# Altium PCB PCB2_1.pcbdoc
Units mil, origin at the board's own origin, x right, y up, seen from the top; angles counter-clockwise.
Board outline 5820.75 x 2630.3 mil, 2 copper layers (Top Layer, Bottom Layer); 13 components, 47 nets, 108 pads, 13 vias.
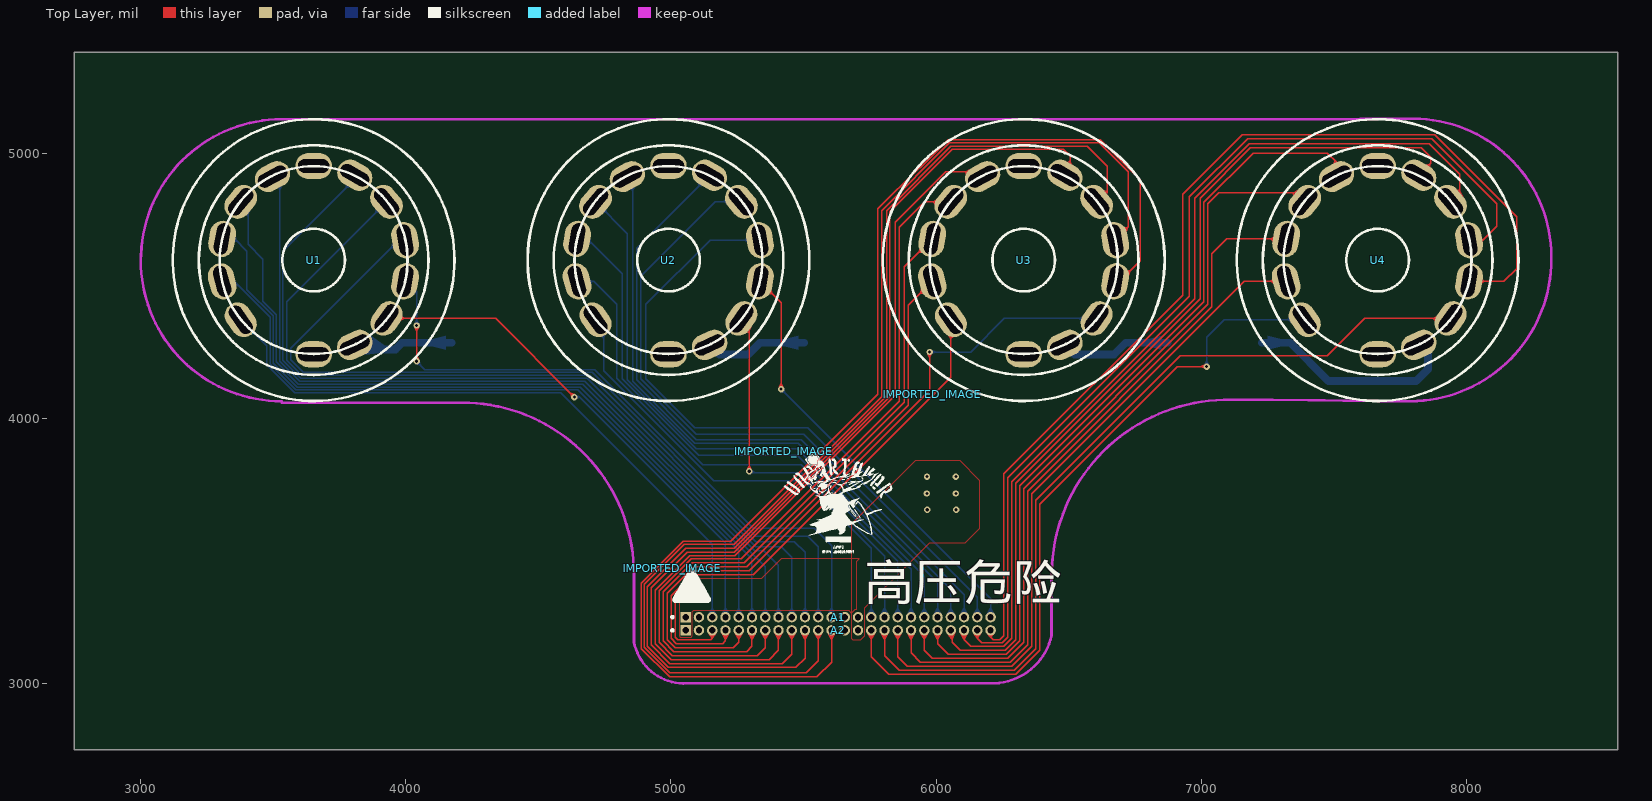
[diagram p0: Top Layer view]
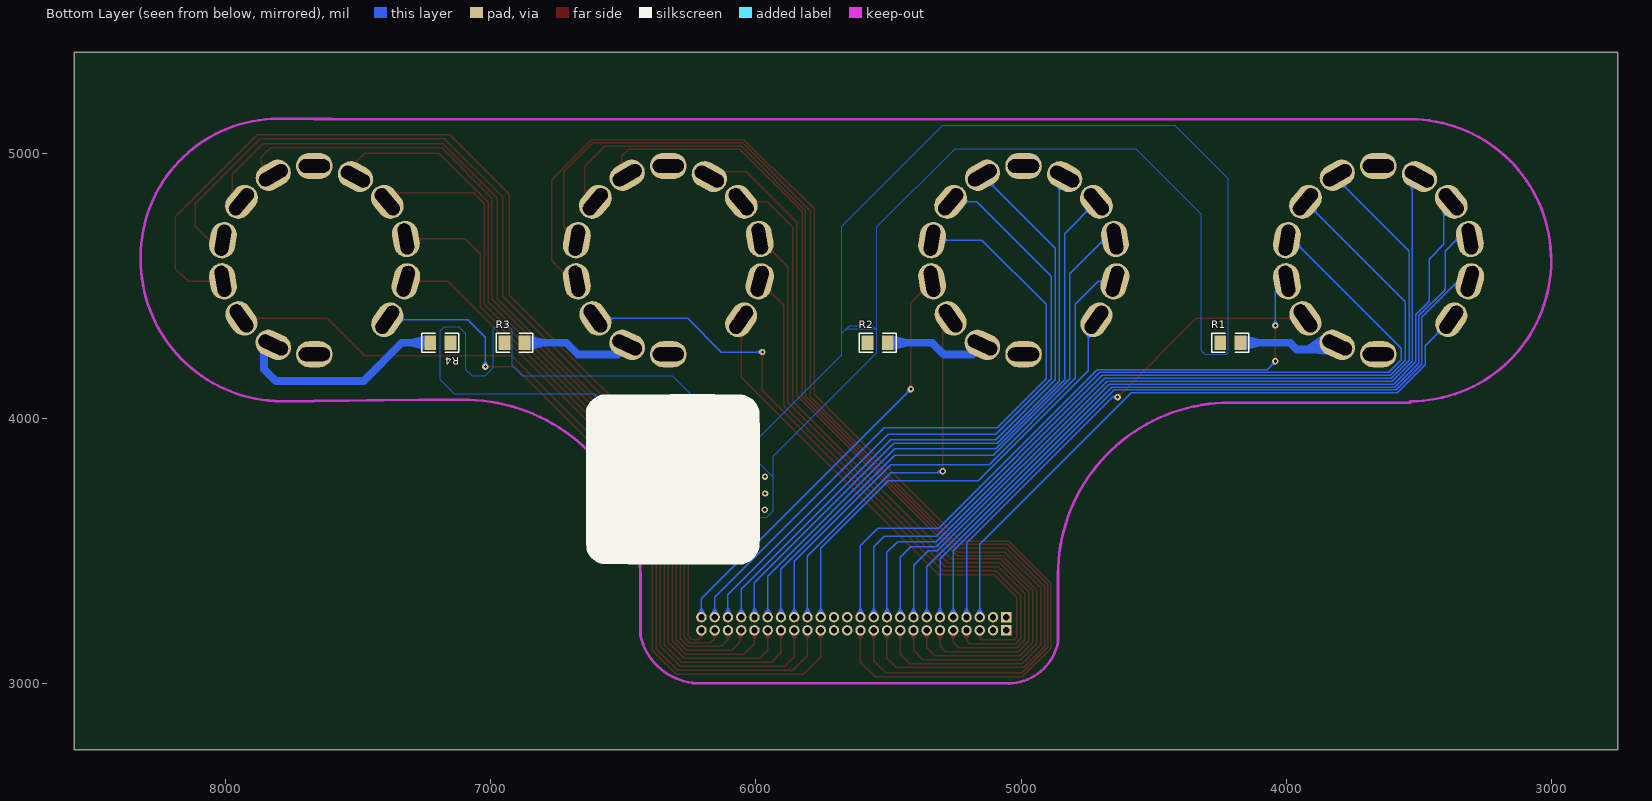
[diagram p1: Bottom Layer view, seen from below]

## Layer stack, top to bottom
Top Layer: signal copper (thickness not stored)
Dielectric: dielectric 12.6, FR-4, Dk 4.8
Bottom Layer: signal copper (thickness not stored)

## Board outline
8570.75,2750 2750,2750 2750,5380.3 8570.75,5380.3

## Components (designator, comment, footprint, x,y, rotation, side; value= is the part's Value field where it differs from the comment)
A1 "1.27*24Pin" 1.27*24PIN_MYSELF 5055.75,3250.3 r90 top
A2 "1.27*24Pin" 1.27*24PIN_MYSELF 5055.75,3200.3 r90 top
IMPORTED_IMAGE "IMPORTED_IMAGE" IMPORTED_IMAGE 5985.75,4090.3 r0 top
IMPORTED_IMAGE "IMPORTED_IMAGE" IMPORTED_IMAGE 5005.75,3435.3 r0 top
IMPORTED_IMAGE "IMPORTED_IMAGE" IMPORTED_IMAGE 5425.75,3875.3 r0 top
R1 "RTX051002BETP" R0805 4210.75,4285.31 r180 bottom
R2 "RTX051002BETP" R0805 5540.75,4285.31 r180 bottom
R3 "RTX051002BETP" R0805 6910.75,4285.31 r180 bottom
R4 "RTX051002BETP" R0805 7190.75,4285.3 r0 bottom
U1 "QS30-1" QS30-1管座 3652.25,4596.95 r0 top
U2 "QS30-1" QS30-1管座 4990.75,4596.95 r0 top
U3 "QS30-1" QS30-1管座 6330.75,4596.95 r0 top
U4 "QS30-1" QS30-1管座 7665.75,4596.95 r0 top

## Footprints (in the part's own frame and the unit in brackets; to place one, negate y for a bottom-side part, rotate by r counter-clockwise, add the part's x,y. Pads: shape width x height; smd on the part's side, far side on the other; paste and mask are expansions set on the pad)
1.27*24PIN_MYSELF [mm]
  rect 1x1 hole 0.6: 1(0,0)
  round 1 hole 0.6: 2(0,-1.27) 3(0,-2.54) 4(0,-3.81) 5(0,-5.08) 6(0,-6.35) 7(0,-7.62) 8(0,-8.89) 9(0,-10.16) 10(0,-11.43) 11(0,-12.7) 12(0,-13.97) 13(0,-15.24) 14(0,-16.51) 15(0,-17.78) 16(0,-19.05) 17(0,-20.32) 18(0,-21.59) 19(0,-22.86) 20(0,-24.13) 21(0,-25.4) 22(0,-26.67) 23(0,-27.94) 24(0,-29.21)
  silkscreen extent -0.09,1.18 0.09,1.36
IMPORTED_IMAGE [mil]
QS30-1管座 [mm]
  oval 3.5x2.5 hole 1.3 slot 3 at 0 deg: 1(0,-9.017) 8(0,9.017)
  oval 3.5x2.5 hole 1.3 slot 3 at 25 deg rot 25: 2(3.937,-8.128)
  oval 3.5x2.5 hole 1.3 slot 3 at 55 deg rot 55: 3(6.985,-5.588)
  oval 3.5x2.5 hole 1.3 slot 3 at 80 deg rot 80: 4(8.763,-2.032) 11(-8.763,2.032)
  oval 3.5x2.5 hole 1.3 slot 3 at 100 deg rot 100: 5(8.763,1.905)
  oval 3.5x2.5 hole 1.3 slot 3 at 130 deg rot 130: 6(6.985,5.588)
  oval 3.5x2.5 hole 1.3 slot 3 at 150 deg rot 150: 7(3.937,8.128)
  oval 3.5x2.5 hole 1.3 slot 3 at 28 deg rot 28: 9(-3.937,8.001)
  oval 3.5x2.5 hole 1.3 slot 3 at 50 deg rot 50: 10(-6.985,5.588)
  oval 3.5x2.5 hole 1.3 slot 3 at 105 deg rot 105: 12(-8.763,-2.032)
  oval 3.5x2.5 hole 1.3 slot 3 at 125 deg rot 125: 13(-6.985,-5.715)
  silkscreen extent -13.5,-13.5 13.5,13.5
R0805 [mil]
  rect 44.6x54.2 smd: 1(-38,0) 2(38,0)
  silkscreen extent -69,-36 69,36

## Via types
v1: diameter 24.02, hole 12.01, Top Layer to Bottom Layer, 13 vias

## Nets (pads, with @x,y where several pads share a name; then routed paths per layer and width w, separated by ;. In a path a pad name is that pad's centre, name@x,y a point inside that pad or via, vN(x,y) a via of type N, cw(c..) or ccw(c..) an arc to the next point about the centre after c; other vN are vias at no path point)
1_0: A1.3 U1.13 | length 2446.4
  Bottom Layer w5: U1.13 3475.75,4273.45 3475.75,4201.41 3580.92,4096.24 4584.81,4096.24 5155.75,3525.3 A1.3@5155.75,3250.3
1_1: A1.4 U1.3 | length 1909.2
  Top Layer w5: U1.3@3927.25,4376.95 4339.1,4376.95 v1(4635.75,4080.3)
  Bottom Layer w5: v1(4635.75,4080.3) 4655.75,4080.3 5205.75,3530.3 A1.4@5205.75,3250.3
1_2: A1.5 U1.12 | length 2723.8
  Bottom Layer w5: U1.12 3353.54,4516.95 3488.75,4381.75 3488.75,4203.96 3585.47,4107.24 4648.81,4107.24 5255.75,3500.3 A1.5@5255.75,3250.3
1_3: A1.6 U1.11 | length 2907.4
  Bottom Layer w5: U1.11@3307.25,4676.95 3354.1,4676.95 3400.75,4630.3 3400.75,4485.3 3499.75,4386.3 3499.75,4208.52 3590.03,4118.24 4657.81,4118.24 5305.75,3470.3 A1.6@5305.75,3250.3
1_4: A1.7 U1.10 | length 3014.3
  Bottom Layer w5: U1.10 3405.1,4789.1 3405.1,4655.95 3460.75,4600.3 3460.75,4440.86 3510.75,4390.86 3510.75,4213.08 3594.59,4129.24 4666.81,4129.24 5355.75,3440.3 A1.7@5355.75,3250.3
1_5: A1.8 U1.9 | length 3103.4
  Bottom Layer w5: U1.9 3524.75,4884.45 3524.75,4214.63 3599.14,4140.24 4675.81,4140.24 5315.75,3500.3 5350.75,3500.3 5405.75,3445.3 A1.8@5405.75,3250.3
1_6: A1.9 U1.7 | length 3263.3
  Bottom Layer w5: U1.7 3807.25,4901.8 3535.75,4630.3 3535.75,4219.19 3603.7,4151.24 4684.81,4151.24 5320.75,3515.3 5415.75,3515.3 5455.75,3475.3 A1.9@5455.75,3250.3
1_7: A1.10 U1.6 | length 3253.2
  Bottom Layer w5: U1.6 3550.75,4440.45 3550.75,4219.75 3608.26,4162.24 4693.81,4162.24 5320.75,3535.3 5465.75,3535.3 5505.75,3495.3 A1.10@5505.75,3250.3
1_8: A1.11 U1.5 | length 3192
  Bottom Layer w5: U1.5 3972.4,4671.95 3565.75,4265.3 3565.75,4220.3 3612.81,4173.24 4702.81,4173.24 5320.75,3555.3 5515.75,3555.3 5555.75,3515.3 A1.11@5555.75,3250.3
1_9: A1.12 U1.4 | length 2442.5
  Top Layer w5: v1(4040.75,4215.3) v1(4040.75,4350.3)
  Bottom Layer w5: U1.4@3997.25,4516.95 4040.75,4473.45 v1(4040.75,4350.3) ; v1(4040.75,4215.3) 4071.81,4184.24 4711.81,4184.24 5310.75,3585.3 5540.75,3585.3 5605.75,3520.3 A1.12@5605.75,3250.3
2_0: A1.15 U2.13 | length 1751.6
  Bottom Layer w5: U2.13 4745.75,4341.95 4745.75,4180.3 5160.75,3765.3 5500.75,3765.3 5755.75,3510.3 A1.15@5755.75,3250.3
2_1: A1.16 U2.3 | length 1461.6
  Top Layer w5: U2.3 5295.75,4346.95 v1(5295.75,3800.3)
  Bottom Layer w5: v1(5295.75,3800.3) 5300.75,3795.3 5490.75,3795.3 5805.75,3480.3 A1.16@5805.75,3250.3
2_2: A1.17 U2.12 | length 2021.7
  Bottom Layer w5: U2.12 4709.1,4516.95 4794.75,4431.3 4794.75,4151.3 5120.75,3825.3 5490.75,3825.3 5855.75,3460.3 A1.17@5855.75,3250.3
2_3: A1.18 U2.11 | length 2188.4
  Bottom Layer w5: U2.11 4684.1,4676.95 4815.75,4545.3 4815.75,4149.19 5104.64,3860.3 5475.75,3860.3 5905.75,3430.3 A1.18@5905.75,3250.3
2_4: A1.19 U2.10 | length 2303.2
  Bottom Layer w5: U2.10@4715.75,4816.95 4835.75,4696.95 4835.75,4144.75 5095.19,3885.3 5475.75,3885.3 5955.75,3405.3 A1.19@5955.75,3250.3
2_5: A1.20 U2.9 | length 2374.7
  Bottom Layer w5: U2.9@4835.75,4911.95 4855.75,4891.95 4855.75,4140.3 5090.75,3905.3 5480.75,3905.3 6005.75,3380.3 A1.20@6005.75,3250.3
2_6: A1.21 U2.7 | length 2502.8
  Bottom Layer w5: U2.7@5145.75,4916.95 4870.75,4641.95 4870.75,4145.3 5095.75,3920.3 5490.75,3920.3 6055.75,3355.3 A1.21@6055.75,3250.3
2_7: A1.22 U2.6 | length 2524.2
  Bottom Layer w5: U2.6 5167.4,4816.95 4885.75,4535.3 4885.75,4150.3 5095.75,3940.3 5500.75,3940.3 6105.75,3335.3 A1.22@6105.75,3250.3
2_8: A1.23 U2.5 | length 2476.8
  Bottom Layer w5: U2.5@5335.75,4671.95 5147.4,4671.95 4905.75,4430.3 4905.75,4150.3 5090.75,3965.3 5515.75,3965.3 6155.75,3325.3 A1.23@6155.75,3250.3
2_9: A1.24 U2.4 | length 1627
  Top Layer w5: U2.4 5415.75,4436.95 v1(5415.75,4110.3)
  Bottom Layer w5: v1(5415.75,4110.3) 6205.75,3320.3 A1.24@6205.75,3250.3
3_0: A2.3 U3.13 | length 1926.7
  Top Layer w5: A2.3@5155.75,3200.3 5155.75,3170.3 5150.75,3165.3 5025.75,3165.3 5015.75,3175.3 5015.75,3325.3 5100.75,3410.3 5310.75,3410.3 6055.75,4155.3 U3.13
3_1: A2.4 U3.3 | length 2540.9
  Top Layer w5: A2.4@5205.75,3200.3 5205.75,3160.3 5195.75,3150.3 5020.75,3150.3 5000.75,3170.3 5000.75,3330.3 5095.75,3425.3 5295.75,3425.3 5975.75,4105.3 v1(5975.75,4250.3)
  Bottom Layer w5: v1(5975.75,4250.3) 6130.75,4250.3 6257.4,4376.95 U3.3
3_2: A2.5 U3.12 | length 2218.7
  Top Layer w5: A2.5@5255.75,3200.3 5255.75,3155.3 5235.75,3135.3 5015.75,3135.3 4985.75,3165.3 4985.75,3340.3 5085.75,3440.3 5285.75,3440.3 5895.75,4050.3 5895.75,4426.95 U3.12
3_3: A2.6 U3.11 | length 2471.2
  Top Layer w5: A2.6@5305.75,3200.3 5305.75,3140.3 5285.75,3120.3 5010.75,3120.3 4970.75,3160.3 4970.75,3345.3 5080.75,3455.3 5275.75,3455.3 5880.75,4060.3 5880.75,4571.95 U3.11
3_4: A2.7 U3.10 | length 2784.3
  Top Layer w5: A2.7@5355.75,3200.3 5355.75,3135.3 5325.75,3105.3 5005.75,3105.3 4955.75,3155.3 4955.75,3350.3 5075.75,3470.3 5265.75,3470.3 5860.75,4065.3 5860.75,4720.3 5957.4,4816.95 U3.10@6055.75,4816.95
3_5: A2.8 U3.9 | length 3059.8
  Top Layer w5: A2.8@5405.75,3200.3 5405.75,3125.3 5370.75,3090.3 5000.75,3090.3 4940.75,3150.3 4940.75,3350.86 5071.19,3481.3 5240.75,3481.3 5845.75,4086.3 5845.75,4740.3 6035.75,4930.3 6157.4,4930.3 U3.9@6175.75,4911.95
3_6: A2.9 U3.7 | length 3645.1
  Top Layer w5: A2.9@5455.75,3200.3 5455.75,3110.3 5420.75,3075.3 4995.75,3075.3 4925.75,3145.3 4925.75,3360.3 5060.75,3495.3 5239.19,3495.3 5824.97,4081.08 5824.97,4779.52 6060.75,5015.3 6480.75,5015.3 6505.75,4990.3 6505.75,4936.95 U3.7@6485.75,4916.95
3_7: A2.10 U3.6 | length 3986.2
  Top Layer w5: A2.10@5505.75,3200.3 5505.75,3095.3 5470.75,3060.3 4990.75,3060.3 4910.75,3140.3 4910.75,3365.3 5055.75,3510.3 5238.64,3510.3 5813.97,4085.64 5813.97,4784.08 6056.19,5026.3 6569.75,5026.3 6645.75,4950.3 6645.75,4856.95 U3.6
3_8: A2.11 U3.5 | length 4319.8
  Top Layer w5: A2.11@5555.75,3200.3 5555.75,3085.3 5510.75,3040.3 4995.19,3040.3 4899.75,3135.75 4899.75,3374.3 5050.75,3525.3 5238.08,3525.3 5794.42,4081.64 5794.42,4783.97 6050.75,5040.3 6615.75,5040.3 6725.75,4930.3 6725.75,4721.95 U3.5@6675.75,4671.95
3_9: A2.12 U3.4 | length 4630.9
  Top Layer w5: A2.12@5605.75,3200.3 5605.75,3080.3 5550.75,3025.3 4994.64,3025.3 4888.75,3131.19 4888.75,3378.86 5046.19,3536.3 5225.75,3536.3 5780.75,4091.3 5780.75,4790.3 5935.75,4945.3 5940.19,4945.3 6046.19,5051.3 6620.31,5051.3 6770.75,4900.86 6770.75,4595.3 6692.4,4516.95 U3.4
4_0: A2.15 U4.13 | length 2702.2
  Top Layer w5: A2.15@5755.75,3200.3 5755.75,3100.3 5820.75,3035.3 6300.75,3035.3 6390.75,3125.3 6390.75,3675.3 6910.75,4195.3 v1(7020.75,4195.3)
  Bottom Layer w5: v1(7020.75,4195.3) 7020.75,4305.3 7087.4,4371.95 U4.13
4_1: A2.16 U4.3 | length 3130.3
  Top Layer w5: A2.16@5805.75,3200.3 5805.75,3105.3 5860.75,3050.3 6295.75,3050.3 6375.75,3130.3 6375.75,3690.3 6920.75,4235.3 7475.75,4235.3 7617.4,4376.95 U4.3
4_2: A2.17 U4.12 | length 2517.6
  Top Layer w5: A2.17@5855.75,3200.3 5855.75,3100.3 5890.75,3065.3 6285.75,3065.3 6360.75,3140.3 6360.75,3715.3 7162.4,4516.95 U4.12
4_3: A2.18 U4.11 | length 2632.8
  Top Layer w5: A2.18@5905.75,3200.3 5905.75,3115.3 5940.75,3080.3 6280.75,3080.3 6345.75,3145.3 6345.75,3725.3 7040.75,4420.3 7040.75,4620.3 7097.4,4676.95 U4.11
4_4: A2.19 U4.10 | length 2825.5
  Top Layer w5: A2.19@5955.75,3200.3 5955.75,3125.3 5985.75,3095.3 6270.75,3095.3 6330.75,3155.3 6330.75,3735.3 7025.75,4430.3 7025.75,4810.3 7065.75,4850.3 7357.4,4850.3 U4.10@7390.75,4816.95
4_5: A2.20 U4.9 | length 2984.6
  Top Layer w5: A2.20@6005.75,3200.3 6005.75,3150.3 6045.75,3110.3 6265.75,3110.3 6315.75,3160.3 6315.75,3745.3 7010.75,4440.3 7010.75,4815.3 7195.75,5000.3 7475.75,5000.3 7510.75,4965.3 U4.9@7510.75,4911.95
4_6: A2.21 U4.7 | length 3319.1
  Top Layer w5: A2.21@6055.75,3200.3 6060.75,3195.3 6060.75,3155.3 6090.75,3125.3 6260.75,3125.3 6300.75,3165.3 6300.75,3755.3 6995.75,4450.3 6995.75,4830.3 7185.75,5020.3 7830.75,5020.3 7865.75,4985.3 7865.75,4961.95 U4.7@7820.75,4916.95
4_7: A2.22 U4.6 | length 3437.9
  Top Layer w5: A2.22@6105.75,3200.3 6105.75,3165.3 6130.75,3140.3 6255.75,3140.3 6285.75,3170.3 6285.75,3760.3 6975.75,4450.3 6975.75,4830.3 7180.75,5035.3 7860.75,5035.3 7975.75,4920.3 7975.75,4845.3 7947.4,4816.95 U4.6
4_8: A2.23 U4.5 | length 3668.8
  Top Layer w5: A2.23@6155.75,3200.3 6155.75,3170.3 6171.75,3154.3 6249.75,3154.3 6270.75,3175.3 6270.75,3775.3 6955.75,4460.3 6955.75,4835.3 7175.75,5055.3 7870.75,5055.3 8115.75,4810.3 8115.75,4725.3 8062.4,4671.95 U4.5@8010.75,4671.95
4_9: A2.24 U4.4 | length 3906.6
  Top Layer w5: A2.24@6205.75,3200.3 6205.75,3175.3 6215.75,3165.3 6240.75,3165.3 6255.75,3180.3 6255.75,3790.3 6930.75,4465.3 6930.75,4845.3 7155.75,5070.3 7880.75,5070.3 8190.75,4760.3 8190.75,4565.3 8142.4,4516.95 U4.4
$1N539: R1.2 U1.2 | length 382.7
  Bottom Layer w30: U1.2 3823.9,4260.3 3960.75,4260.3 3985.75,4285.3 R1.2@4172.71,4285.3
$1N910: R2.2 U2.2 | length 390.8
  Bottom Layer w30: U2.2 5182.4,4240.3 5290.75,4240.3 5335.75,4285.3 R2.2@5502.71,4285.3
$1N1217: R3.2 U3.2 | length 420.8
  Bottom Layer w30: U3.2 6522.4,4240.3 6670.75,4240.3 6715.75,4285.3 R3.2@6872.71,4285.3
$1N1524: R4.2 U4.2 | length 811.8
  Bottom Layer w30: R4.2 7335.75,4285.31 7480.75,4140.3 7810.75,4140.3 7855.75,4185.3 7855.75,4241.95 U4.2
GND: A1.2 A1.13 A2.2 A2.13
HV: A1.1 A1.14 A2.1 A2.14 R1.1 R2.1 R3.1 R4.1
  other v1: 5966.59,3655.3 6075.75,3655.3 5965.49,3716.45 6075.04,3716.45 5965.75,3780.3 6075.04,3780.3
"": U1.1 U1.8 U2.1 U2.8 U3.1 U3.8 U4.1 U4.8

## Polygon pours and split planes (outlines as drawn)
HV on Top Layer (solid, remove dead copper, pour order 0): 5685.75,3165.3 5715.75,3165.3 5730.75,3180.3 5730.75,3285.3 5975.75,3530.3 6110.75,3530.3 6165.75,3585.3 6165.75,3765.3 6090.75,3840.3 5920.75,3840.3 5680.75,3600.3 5680.75,3170.3
HV on Top Layer (solid, remove dead copper, pour order 1): 5030.75,3180.3 5035.75,3175.3 5075.75,3175.3 5080.75,3180.3 5080.75,3270.3 5085.75,3275.3 5670.75,3275.3 5680.75,3265.3 5695.75,3280.3 5700.75,3280.3 5700.75,3460.3 5710.75,3470.3 5415.75,3470.3 5340.75,3395.3 5110.75,3395.3 5030.75,3315.3
HV on Bottom Layer (solid, remove dead copper, pour order 2): 5935.75,3780.3 5935.75,3650.3 5960.75,3625.3 6100.75,3625.3 6120.75,3645.3 6120.75,3795.3 5675.75,4240.3 5675.75,4320.3 5645.75,4350.3 5560.75,4350.3 5545.75,4335.3 5545.75,4245.3 5935.75,3855.3
HV on Bottom Layer (solid, remove dead copper, pour order 3): 4220.75,4320.3 4220.75,4245.3 4225.75,4240.3 4305.75,4240.3 4320.75,4255.3 4320.75,4770.3 4565.75,5015.3 5250.75,5015.3 5545.75,4720.3 5545.75,4335.3 5660.75,4335.3 5675.75,4320.3 5675.75,4725.3 5295.75,5105.3 4420.75,5105.3 4220.75,4905.3
HV on Bottom Layer (solid, remove dead copper, pour order 5): 7135.75,4090.3 7190.75,4145.3 7190.75,4330.3 7175.75,4345.3 7120.75,4345.3 7095.75,4320.3 7095.75,4185.3 7070.75,4160.3 7020.75,4160.3 6990.75,4190.3 6990.75,4335.3 6980.75,4345.3 6930.75,4345.3 6920.75,4335.3 6920.75,4200.3 6880.75,4160.3 6315.75,4160.3 5935.75,3780.3 5935.75,3650.3 5960.75,3625.3 6100.75,3625.3 6120.75,3645.3 6120.75,3795.3 6315.75,3795.3 6610.75,4090.3
HV on Bottom Layer (solid, remove dead copper, pour order 6): 7135.75,4090.3 7190.75,4145.3 7190.75,4330.3 7175.75,4345.3 7120.75,4345.3 7095.75,4320.3 7095.75,4185.3 7070.75,4160.3 7020.75,4160.3 6990.75,4190.3 6990.75,4335.3 6980.75,4345.3 6930.75,4345.3 6920.75,4335.3 6920.75,4200.3 6880.75,4160.3 6315.75,4160.3 5935.75,3780.3 5935.75,3650.3 5960.75,3625.3 6100.75,3625.3 6120.75,3645.3 6120.75,3780.3 6345.75,4005.3 6610.75,4090.3

## Keep-outs
Board Outline Layer:
  lines w10 net "": 3000,4596.05 ccw(c3531.5,4596.05) 3531.5,4064.55 ; 3000.75,4596.95 cw(c3532.25,4596.95) 3532.25,5128.45 3652.25,5128.45 7665.75,5128.45 ; 3531.5,4059.55 4211.5,4059.55 cw(c4211.5,3410.3) 4860.75,3410.3 4860.75,3155.3 ccw(c5049.95,3192.9) 5060.75,3000.3 6205.75,3000.3 ccw(c6210.35,3231.37) 6435.75,3180.3 6435.75,3415.3 ; 6436.12,3420.68 cw(c7100.68,3405.37) 7085.37,4069.93 ; 7085.38,4069.93 7270.38,4069.93 7270.75,4070.3 7665.6,4065.3 ccw(c7665.6,4065.45) 7665.75,4065.45 ; 7600.75,5130.3 7800.75,5130.3 cw(c7800.75,4610.3) 8320.75,4610.3 8320.75,4600.3 cw(c7786.25,4599.04) 7790,4064.55 7670,4064.55

## Other copper
Top Layer:
  region net 1_1: 3991.59,4374.45 3993.33,4379.45 3987.2,4385.7 3981,4368.2
  region net 3_9: 6732.28,4553.3 6730.63,4558.72 6722.58,4559.51 6728.21,4540.39
  region net 3_8: 6723.02,4715.68 6720.71,4720.45 6711.95,4720.53 6719.95,4703.78
  region net 3_7: 6647.52,4855.18 6643.98,4858.72 6635.04,4858.61 6646.33,4845.16
  region net 3_6: 6508.25,4968.29 6503.25,4971.17 6497,4967.28 6514.5,4957.18
  region net 3_5: 6111.93,4932.8 6108.53,4927.8 6112.91,4921.55 6125.19,4939.05
  region net 3_4: 5989.63,4819.45 5988.02,4814.45 5994.29,4808.2 6000.04,4825.7
  region net 3_3: 5933.87,4628.61 5936.57,4624.24 5945.78,4624.61 5936.38,4639.96
  region net 3_2: 5942.01,4469.68 5950.68,4469.51 5942.95,4486.53 5939.78,4474.52
  region net 3_0: 6053.25,4301.09 6058.25,4299.91 6064.5,4306.68 6047,4310.88
  region net 4_1: 7876.41,4379.45 7874.67,4374.45 7880.8,4368.2 7887,4385.7
  region net 4_9: 8067.78,4514.45 8068.66,4519.45 8062.26,4525.7 8059.18,4508.2
  region net 4_8: 8062.4,4669.45 8062.4,4674.45 8059.18,4680.7 8062.26,4663.2
  region net 4_7: 7973.25,4862.28 7967,4862.23 7991.1,4833.51 7978.25,4856.32
  region net 4_6: 7864.32,4956.99 7859.84,4959.58 7848.93,4957.51 7864.57,4948.4
  region net 4_5: 7506.62,4972.97 7501.61,4970.9 7501.11,4962.57 7513.03,4968.03
  region net 4_4: 7349.09,4852.8 7344.89,4847.8 7347.15,4841.55 7365.7,4863.67
  region net 4_3: 7263.72,4679.45 7262.84,4674.45 7269.24,4668.2 7272.32,4685.7
  region net 4_2: 7261.63,4519.45 7262.97,4514.45 7272.15,4508.2 7267.52,4525.7
  region net 4_9: 6190.99,3187.28 6203.25,3175.3 6208.25,3175.3 6220.51,3187.28
  region net 4_8: 6140.99,3187.28 6153.25,3170.3 6158.25,3170.3 6170.51,3187.28
  region net 4_7: 6090.99,3187.28 6103.25,3166.84 6108.25,3166.84 6120.51,3187.28
  region net 4_6: 6044.78,3183.96 6058.25,3166.36 6063.25,3167.67 6073.34,3191.46
  region net 4_5: 5990.99,3187.28 6003.25,3166.84 6008.25,3166.84 6020.51,3187.28
  region net 4_4: 5940.99,3187.28 5953.25,3166.84 5958.25,3166.84 5970.51,3187.28
  region net 4_3: 5890.99,3187.28 5903.25,3166.84 5908.25,3166.84 5920.51,3187.28
  region net 4_2: 5840.99,3187.28 5853.25,3166.84 5858.25,3166.84 5870.51,3187.28
  region net 4_1: 5790.99,3187.28 5803.25,3166.84 5808.25,3166.84 5820.51,3187.28
  region net 4_0: 5740.99,3187.28 5753.25,3166.84 5758.25,3166.84 5770.51,3187.28
  region net 3_9: 5590.99,3187.28 5603.25,3166.84 5608.25,3166.84 5620.51,3187.28
  region net 3_8: 5540.99,3187.28 5553.25,3166.84 5558.25,3166.84 5570.51,3187.28
  region net 3_7: 5490.99,3187.28 5503.25,3166.84 5508.25,3166.84 5520.51,3187.28
  region net 3_6: 5440.99,3187.28 5453.25,3166.84 5458.25,3166.84 5470.51,3187.28
  region net 3_5: 5390.99,3187.28 5403.25,3166.84 5408.25,3166.84 5420.51,3187.28
  region net 3_4: 5340.99,3187.28 5353.25,3166.84 5358.25,3166.84 5370.51,3187.28
  region net 3_3: 5290.99,3187.28 5303.25,3166.84 5308.25,3166.84 5320.51,3187.28
  region net 3_2: 5240.99,3187.28 5253.25,3166.84 5258.25,3166.84 5270.51,3187.28
  region net 3_1: 5190.99,3187.28 5203.25,3166.84 5208.25,3166.84 5220.51,3187.28
  region net 3_0: 5140.99,3187.28 5153.25,3170.3 5158.25,3170.3 5170.51,3187.28
  region net 2_1: 5293.25,4323.04 5298.25,4330.07 5304.5,4346.49 5287,4323.91
  region net 2_9: 5380.71,4468.46 5383.02,4473.22 5379.95,4485.13 5371.95,4468.38
  region net 1_1: 4636.5,4092.29 4623.08,4096.5 4619.55,4092.97 4623.77,4079.55
  region net 2_1: 5304.76,3808.25 5298.25,3820.72 5293.25,3820.72 5286.74,3808.25
  region net 3_1: 5966.74,4242.36 5973.25,4229.89 5978.25,4229.89 5984.76,4242.36
  region net 4_0: 7012.81,4204.31 7000.34,4197.8 7000.34,4192.8 7012.81,4186.3
  region net 2_9: 5424.76,4118.25 5418.25,4130.72 5413.25,4130.72 5406.74,4118.25
  region net 1_9: 4049.76,4223.25 4043.25,4235.72 4038.25,4235.72 4031.74,4223.25
  region net 1_9: 4031.74,4342.36 4038.25,4329.89 4043.25,4329.89 4049.76,4342.36
Bottom Layer:
  region net $1N539: 3898.8,4245.3 3918.28,4275.3 3865.88,4312.8 3845.89,4240.67
  region net 1_9: 4038.98,4471.68 4042.52,4475.22 4041.45,4485.13 4033.45,4468.38
  region net 1_8: 3945.21,4648.3 3946.27,4642.29 3953.03,4640.21 3949.19,4661.12
  region net 1_7: 3885.4,4778.64 3888.63,4774.8 3897.96,4775.29 3886.67,4788.75
  region net 1_6: 3773.28,4871.37 3777.77,4868.78 3788.67,4870.85 3772.98,4879.91
  region net 1_5: 3522.25,4862.01 3527.25,4864.67 3533.5,4875.49 3516,4866.19
  region net 1_4: 3402.6,4763.11 3407.6,4769.07 3413.85,4784.01 3396.35,4764.28
  region net 1_3: 3362.59,4672 3359.13,4687.79 3354.9,4663.78 3361.53,4665.99
  region net 1_2: 3366.18,4500.78 3363.91,4510.12 3359.88,4510.68 3361.54,4496.58
  region net 1_0: 3432.57,4320.16 3430.86,4330.71 3419.36,4317.46 3429.29,4316.38
  region net $1N539: 4105.42,4270.3 4150.42,4258.2 4150.42,4312.41 4105.42,4300.3
  region net $1N910: 5435.42,4270.3 5480.42,4258.2 5480.42,4312.41 5435.42,4300.3
  region net $1N1217: 6805.42,4270.3 6850.42,4258.2 6850.42,4312.41 6805.42,4300.3
  region net 3_1: 6541.41,4379.45 6539.67,4374.45 6545.8,4368.2 6552,4385.7
  region net $1N1524: 7296.08,4300.31 7251.08,4312.41 7251.08,4258.2 7296.08,4270.31
  region net 4_0: 7324.67,4374.45 7326.41,4369.45 7337,4363.2 7330.8,4380.7
  region net 2_9: 6220.51,3263.32 6208.25,3283.77 6203.25,3283.77 6190.99,3263.32
  region net 2_8: 6170.51,3263.32 6158.25,3283.77 6153.25,3283.77 6140.99,3263.32
  region net 2_7: 6120.51,3263.32 6108.25,3283.77 6103.25,3283.77 6090.99,3263.32
  region net 2_6: 6070.51,3263.32 6058.25,3283.77 6053.25,3283.77 6040.99,3263.32
  region net 2_5: 6020.51,3263.32 6008.25,3283.77 6003.25,3283.77 5990.99,3263.32
  region net 2_4: 5970.51,3263.32 5958.25,3283.77 5953.25,3283.77 5940.99,3263.32
  region net 2_3: 5920.51,3263.32 5908.25,3283.77 5903.25,3283.77 5890.99,3263.32
  region net 2_2: 5870.51,3263.32 5858.25,3283.77 5853.25,3283.77 5840.99,3263.32
  region net 2_1: 5820.51,3263.32 5808.25,3283.77 5803.25,3283.77 5790.99,3263.32
  region net 2_0: 5770.51,3263.32 5758.25,3283.77 5753.25,3283.77 5740.99,3263.32
  region net 1_9: 5620.51,3263.32 5608.25,3283.77 5603.25,3283.77 5590.99,3263.32
  region net 1_8: 5570.51,3263.32 5558.25,3283.77 5553.25,3283.77 5540.99,3263.32
  region net 1_7: 5520.51,3263.32 5508.25,3283.77 5503.25,3283.77 5490.99,3263.32
  region net 1_6: 5470.51,3263.32 5458.25,3283.77 5453.25,3283.77 5440.99,3263.32
  region net 1_5: 5420.51,3263.32 5408.25,3283.77 5403.25,3283.77 5390.99,3263.32
  region net 1_4: 5370.51,3263.32 5358.25,3283.77 5353.25,3283.77 5340.99,3263.32
  region net 1_3: 5320.51,3263.32 5308.25,3283.77 5303.25,3283.77 5290.99,3263.32
  region net 1_2: 5270.51,3263.32 5258.25,3283.77 5253.25,3283.77 5240.99,3263.32
  region net 1_1: 5220.51,3263.32 5208.25,3283.77 5203.25,3283.77 5190.99,3263.32
  region net 1_0: 5170.51,3263.32 5158.25,3283.77 5153.25,3283.77 5140.99,3263.32
  region net 2_8: 5277.84,4674.45 5278.72,4669.45 5287.32,4663.2 5284.24,4680.7
  region net 2_7: 5198.02,4819.45 5199.63,4814.45 5210.04,4808.2 5204.29,4825.7
  region net 2_6: 5102.18,4876.92 5106.66,4874.33 5117.57,4876.4 5101.93,4885.5
  region net 2_5: 4853.25,4858.02 4858.25,4860.68 4864.5,4871.5 4847,4862.2
  region net 2_4: 4754.37,4774.8 4757.6,4778.64 4756.33,4788.75 4745.04,4775.29
  region net 2_3: 4698.75,4658.76 4699.81,4664.78 4695.83,4677.59 4692.12,4656.55
  region net 2_2: 4704.87,4514.45 4703.53,4519.45 4694.35,4525.7 4698.98,4508.2
  region net 2_0: 4743.25,4301.86 4748.25,4303.92 4754.5,4314.99 4737,4307.63
  region net 1_1: 4643.69,4071.3 4655.75,4077.8 4655.75,4082.8 4643.69,4089.31
  region net 2_1: 5299.22,3788.81 5314.77,3792.8 5317.06,3797.8 5306.72,3805.18
  region net 3_1: 5983.69,4241.3 5996.16,4247.8 5996.16,4252.8 5983.69,4259.31
  region net 4_0: 7029.76,4203.25 7023.25,4215.72 7018.25,4215.72 7011.74,4203.25
  region net 2_9: 5415,4098.32 5428.42,4094.1 5431.95,4097.64 5427.73,4111.05
  region net 1_9: 4040,4203.32 4053.42,4199.1 4056.95,4202.64 4052.73,4216.05
  region net 1_9: 4049.76,4358.25 4043.25,4370.72 4038.25,4370.72 4031.74,4358.25

## Silkscreen, mask and mechanical layers (free items; w line width, h text height)
Top Silkscreen Layer:
  text "高压危险" at 5731.24,3315.38 h135.94